# EAGLE board ME433_Spring2017 (EAGLE 8.1.0)

Size 116.51 x 80 mm. Coordinates in mm from the lower left corner, seen from the top.
Outline: 0,0 116.51,0 116.51,80 0,80 0,0
Copper layers (1*16): Top 0.035mm / dielectric 1.5mm / Bottom 0.035mm
Design rules "default": minimum track width 10mil, minimum drill 24mil, track to track 8mil, track to pad 8mil, pad to pad 8mil, via to via 8mil, smd to smd 8mil, copper to edge 40mil, drill to drill 8mil, minimum pad ring 10mil, minimum via ring 8mil, stop-mask expansion 4mil, vias tented up to drill 0mil, thermal gap 10mil

## Footprints (pad centres in the part's own frame; a part is rotated, then mirrored left to right if it is on the bottom)
C025-025X050 = drill 0.813 octagon: 1 -1.27,0; 2 1.27,0
MCP1702 = drill 0.813 long: B 0,-1.27; C -2.54,-1.27; E 2.54,-1.27
1X08 = drill 1.016 pad 1.88: 1 0,0; 2 2.54,0; 3 5.08,0; 4 7.62,0; 5 10.16,0; 6 12.7,0; 7 15.24,0; 8 17.78,0
B45181B = drill 0.813: + -2.54,0 | drill 0.813 octagon: - 2.54,0
HC49U = drill 0.7 pad 1.2: 1 -2.413,0; 2 -0.027,0; 3 2.413,0
SFH482 = drill 0.813 long: A -1.27,0; K 1.27,0
0204/7 = drill 0.813 octagon: 1 -3.81,0; 2 3.81,0
USB-MB-H = drill 0.8: D+ 5.1,0; D- 3.9,0.8; GND 5.1,-1.6; ID 3.9,-0.8; VBUS 5.1,1.6 | drill 1.9: P$6 0,-3.65; P$7 0,3.65
BUTTONS = drill 1.016 pad 1.88: 1 0,0; 2 2.54,0
PIC = drill 0.813 long: 1 -16.51,-3.81; 2 -13.97,-3.81; 3 -11.43,-3.81; 4 -8.89,-3.81; 5 -6.35,-3.81; 6 -3.81,-3.81; 7 -1.27,-3.81; 8 1.27,-3.81; 9 3.81,-3.81; 10 6.35,-3.81; 11 8.89,-3.81; 12 11.43,-3.81; 13 13.97,-3.81; 14 16.51,-3.81; 15 16.51,3.81; 16 13.97,3.81; 17 11.43,3.81; 18 8.89,3.81; 19 6.35,3.81; 20 3.81,3.81; 21 1.27,3.81; 22 -1.27,3.81; 23 -3.81,3.81; 24 -6.35,3.81; 25 -8.89,3.81; 26 -11.43,3.81; 27 -13.97,3.81; 28 -16.51,3.81
1X06_NO_SILK = drill 1.016 pad 1.88: 1 0,0; 2 2.54,0; 3 5.08,0; 4 7.62,0; 5 10.16,0; 6 12.7,0
SLIDER_SWITCH_1MM = drill 1.016 pad 1.88: 1 0,0; 2 2.54,0; 3 5.08,0

## Placement (x,y rotation side)
0.1U1  0.1u  [C025-025X050]  31.75,45.72 270 top
_  MCP1702  [MCP1702]  44.45,76.2 180 top
CONN_8_A  pinout_1  [1X08]  99.06,40.64 270 top
CONN_8_A1  pinout_2  [1X08]  22.86,54.61 270 top
CRY_1  0.1u  [C025-025X050]  88.9,48.26 270 top
CRY_2  0.1u  [C025-025X050]  88.9,54.61 270 top
CRY_TANTALUM  10u  [B45181B]  78.74,64.77 270 top
CRYSTAL_8MHZ  OSC_8MHZ7A-12.5KHZ  [HC49U]  44.45,41.91 270 top
GREEN  led  [SFH482]  68.58,41.91 270 top
GREEN_LED  330  [0204/7]  71.12,50.8 270 top
J1  USB-MB-H  [USB-MB-H]  16.51,76.2 0 top
PB_LED  button_led  [BUTTONS]  31.75,39.37 270 top
PB_PULLDOWN  10k  [0204/7]  83.82,19.05 180 top
PB_RST  reset_swtch  [BUTTONS]  57.15,64.77 180 top
PIC32MX250  pic  [PIC]  55.88,43.18 270 top
PIC_KIT_3  programmer  [1X06_NO_SILK]  99.06,2.54 90 bottom
RED  led  [SFH482]  55.88,77.47 0 top
RED_LED  330  [0204/7]  63.5,73.66 270 top
RST_PULLUP  10k  [0204/7]  85.09,6.35 90 top
SLIDER_SWITCH  mains  [SLIDER_SWITCH_1MM]  26.67,77.47 0 top
VCAP  10u  [B45181B]  68.58,13.97 270 top
VDD_GND  0.1u  [C025-025X050]  88.9,41.91 270 top

## Library data of the parts
0.1U1 _ CRY_1 CRY_2 CRY_TANTALUM GREEN GREEN_LED J1 PB_LED PB_PULLDOWN PB_RST PIC32MX250 RED RED_LED RST_PULLUP SLIDER_SWITCH VCAP VDD_GND = ME433_Spring2017
CONN_8_A CONN_8_A1 = ME433_Spring2017; PROD_ID: CONN-08438
CRYSTAL_8MHZ = ME433_Spring2017; OC_FARNELL: unknown; OC_NEWARK: unknown
PIC_KIT_3 = ME433_Spring2017; PROD_ID: CONN-08437

## Nets
+3V3: 0.1U1.1 _.C CRY_2.1 CRY_TANTALUM.+ PB_LED.1 PIC32MX250.13 PIC32MX250.23 PIC32MX250.28 RED.A RST_PULLUP.2 VDD_GND.1
+5V: CONN_8_A1.2 J1.VBUS PIC32MX250.15 SLIDER_SWITCH.1
GND: 0.1U1.2 _.E CONN_8_A1.1 CONN_8_A.1 CRY_1.1 CRY_2.2 CRY_TANTALUM.- CRYSTAL_8MHZ.2 GREEN_LED.1 J1.GND PB_PULLDOWN.2 PB_RST.1 PIC32MX250.8 PIC32MX250.19 PIC32MX250.27 PIC_KIT_3.3 RED_LED.2 SLIDER_SWITCH.3 VCAP.- VDD_GND.2
N$1: CONN_8_A.2 PIC_KIT_3.2
N$2: PIC32MX250.4 PIC_KIT_3.4
N$3: CONN_8_A.3 GREEN.A PIC32MX250.12
N$4: J1.D+ PIC32MX250.22
N$5: CRYSTAL_8MHZ.1 PIC32MX250.9
N$6: CRYSTAL_8MHZ.3 PIC32MX250.10
N$7: GREEN.K GREEN_LED.2
N$8: PIC32MX250.5 PIC_KIT_3.5
N$9: J1.D- PIC32MX250.21
N$10: CONN_8_A.4 PB_LED.2 PB_PULLDOWN.1 PIC32MX250.11
N$11: PIC32MX250.20 VCAP.+
N$14: _.B CRY_1.2 SLIDER_SWITCH.2
N$15: PB_RST.2 PIC32MX250.1 PIC_KIT_3.1 RST_PULLUP.1
N$16: RED.K RED_LED.1
N$18: J1.ID PIC32MX250.14

## Tracks (layer width: path | path; a pad name or v marks a point on that pad's centre or on a via)
+3V3  (10 unrouted)
+5V  (3 unrouted)
GND  (19 unrouted)
N$1  (1 unrouted)
N$2  (1 unrouted)
N$3  (2 unrouted)
N$4  (1 unrouted)
N$5  (1 unrouted)
N$6  (1 unrouted)
N$7  (1 unrouted)
N$8  (1 unrouted)
N$9  (1 unrouted)
N$10  (3 unrouted)
N$11  (1 unrouted)
N$14  (2 unrouted)
N$15  (3 unrouted)
N$16  (1 unrouted)
N$18  (1 unrouted)